# EAGLE board sensor_board_repair (EAGLE 9.0.0)
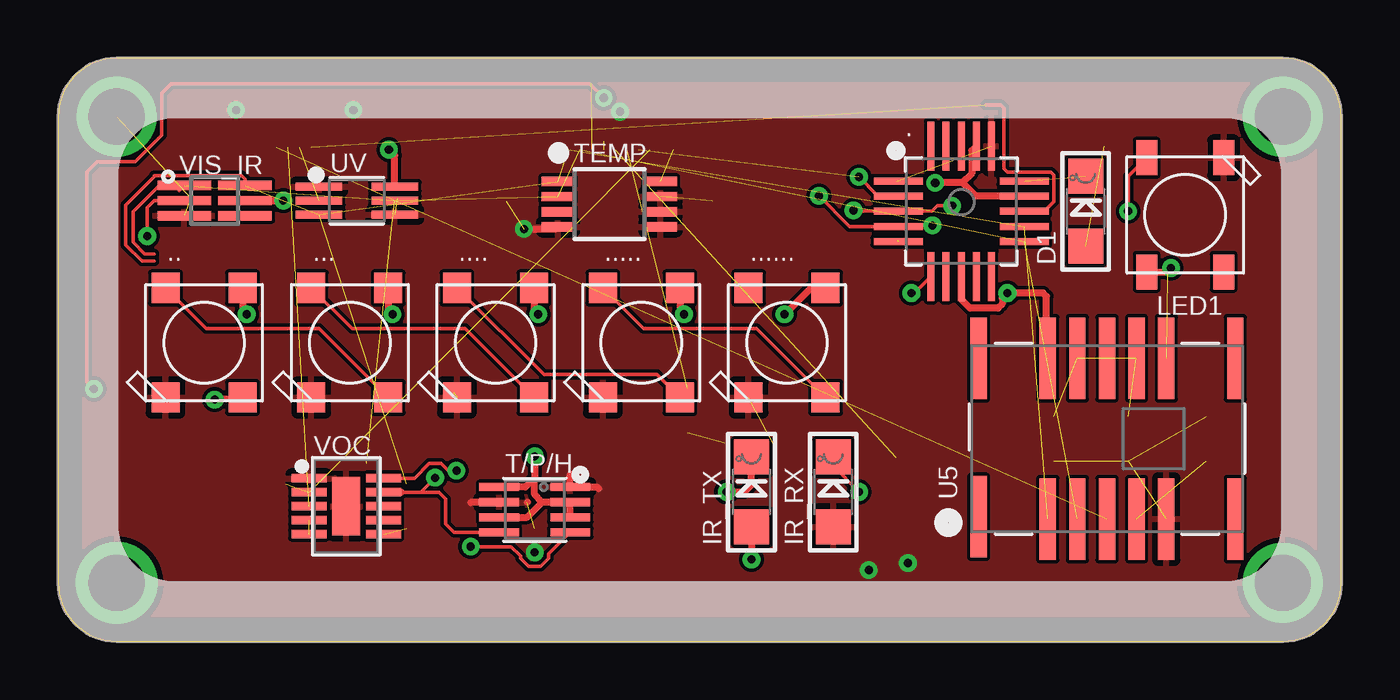
[diagram p0: board, top side]
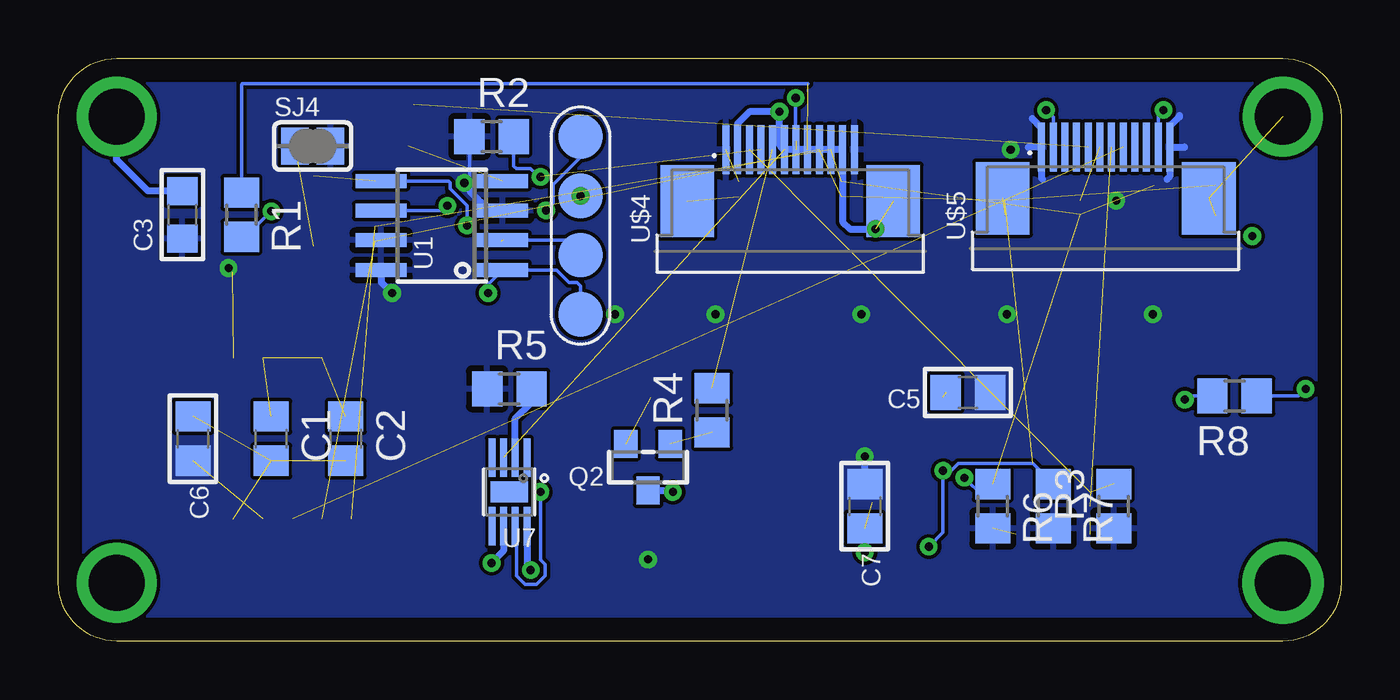
[diagram p1: board, bottom side, seen from below]

Size 55 x 25 mm. Coordinates in mm from the lower left corner, seen from the top.
Copper layers (1*16): Top 0.035mm / dielectric 1.5mm / Bottom 0.035mm
Design rules "default *": minimum track width 12mil, minimum drill 0.35mm, track to track 6mil, track to pad 6mil, pad to pad 6mil, via to via 6mil, smd to smd 6mil, copper to edge 40mil, drill to drill 6mil, minimum pad ring 10mil, minimum via ring 8mil, stop-mask expansion 4mil, vias tented up to drill 0mil, thermal gap 10mil

## Footprints (pad centres in the part's own frame; a part is rotated, then mirrored left to right if it is on the bottom)
MICROBUILDER_AS726X_LGA20_EXTENDED = smd 2.1 x 0.3: 1 -2.7,1.3; 2 -2.7,0.65; 3 -2.7,0; 4 -2.7,-0.65; 5 -2.7,-1.3; 11 2.7,-1.3; 12 2.7,-0.65; 13 2.7,0; 14 2.7,0.65; 15 2.7,1.3 | smd 0.3 x 2.1: 6 -1.3,-2.8; 7 -0.65,-2.8; 8 0,-2.8; 9 0.65,-2.8; 10 1.3,-2.8; 16 1.3,2.8; 17 0.65,2.8; 18 0,2.8; 19 -0.65,2.8; 20 -1.3,2.8
WS2812B-NARROW = smd 1.3 x 1.2: 1-VDD 2.35,-1.65; 2-DOUT 2.35,1.65; 3-GND -2.35,1.65; 4-DIN -2.35,-1.65
C0805 = smd 1.3 x 1.5: 1 -0.95,0; 2 0.95,0
MICROBUILDER__0805 = smd 1.2 x 1.3: 1 -1.016,0; 2 1.016,0
MICROBUILDER_0805_NOTHERMALS = smd 1.3 x 1.5: 1 -0.95,0; 2 0.95,0
MICROBUILDER_CHIPLED_1206 = smd 1.5 x 1.5: A 0,-1.496; C 0,1.496
1X4_POGO = smd 1.905 x 1.905: 1 -3.81,0; 2 -1.27,0; 3 1.27,0; 4 3.81,0
CHIPLED_1206 = smd 1.5 x 1.5: A 0,-1.496; C 0,1.496
WS2812B = smd 1.5 x 0.9: 1-VDD 2.45,-1.65; 2-DOUT 2.45,1.65; 3-GND -2.45,1.65; 4-DIN -2.45,-1.65
SOT23-WIDE = smd 1 x 1.2: 1 -0.95,-1; 2 0.95,-1; 3 0,1
R0805 = smd 1.3 x 1.5: 1 -0.95,0; 2 0.95,0
SOLDERJUMPER_CLOSEDWIRE = smd 1.168 x 1.6: 1 -0.762,0; 2 0.762,0 | smd 0.635 x 0.203: WIRE 0,0
MICROBUILDER_BME280-EXTENDED = smd 1.7 x 0.35: 1 1.525,0.975; 2 1.525,0.325; 3 1.525,-0.325; 4 1.525,-0.975; 5 -1.525,-0.975; 6 -1.525,-0.325; 7 -1.525,0.325; 8 -1.525,0.975
MICROBUILDER_MSOP8_0.65MM = smd 0.4 x 1.4: 1 -0.975,-2.2; 2 -0.325,-2.2; 3 0.325,-2.2; 4 0.975,-2.2; 5 0.975,2.2; 6 0.325,2.2; 7 -0.325,2.2; 8 -0.975,2.2
MICROBUILDER_09_NOV_2015_SOIC8_150MIL = smd 0.6 x 2.2: 1 -1.905,-2.6; 2 -0.635,-2.6; 3 0.635,-2.6; 4 1.905,-2.6; 5 1.905,2.6; 6 0.635,2.6; 7 -0.635,2.6; 8 -1.905,2.6
MICROBUILDER_AMG8833_EXTENDED = smd 0.7 x 3.5: 1 -5.5,-3.35; 2 -2.54,-3.45; 3 -1.27,-3.45; 4 0,-3.45; 5 1.27,-3.45; 6 2.54,-3.45; 7 5.5,-3.45; 8 5.5,3.45; 9 2.54,3.45; 10 1.27,3.45; 11 0,3.45; 12 -1.27,3.45; 13 -2.54,3.45; 14 -5.5,3.45
VSOP383_EXTENDED = smd 0.3 x 1.65: 1 -0.75,-1.475; 2 -0.25,-1.475; 3 0.25,-1.475; 4 0.75,-1.475; 5 0.75,1.475; 6 0.25,1.475; 7 -0.25,1.475; 8 -0.75,1.475 | smd 1.6 x 0.9: THERMAL 0,0
TRICO04C_SEN_BRD = drill 2.4 pad 3.5: P$1 2.5,2.5 | drill 2.4: P$2 52.5,2.5; P$3 52.5,22.5; P$4 2.5,22.5
FPC_TE_1-1734839-2_EXTENDED = smd 0.3 x 2.1: 1 -2.75,0.5; 2 -2.25,0.5; 3 -1.75,0.5; 4 -1.25,0.5; 5 -0.75,0.5; 6 -0.25,0.5; 7 0.25,0.5; 8 0.75,0.5; 9 1.25,0.5; 10 1.75,0.5; 11 2.25,0.5; 12 2.75,0.5 | smd 2.3 x 3.1: SH1 -4.42,-1.7; SH2 4.42,-1.7
MICROBUILDER_VEML6070_EXTENDED = smd 2 x 0.35: 1 -1.625,0.6; 2 -1.625,0; 3 -1.625,-0.6; 4 1.625,-0.6; 5 1.625,0; 6 1.625,0.6
MICROBUILDER_DFN6_TAOS_EXTENDED = smd 2.3 x 0.4: 1 -1.3,0.65; 2 -1.3,0; 3 -1.3,-0.65; 4 1.3,-0.65; 5 1.3,0; 6 1.3,0.65
MICROBUILDER_CCS811-EXTENDED = smd 1.5 x 0.35: 1 -1.6,1.2; 2 -1.6,0.6; 3 -1.6,0; 4 -1.6,-0.6; 5 -1.6,-1.2; 6 1.6,-1.2; 7 1.6,-0.6; 8 1.6,0; 9 1.6,0.6; 10 1.6,1.2 | smd 1.2 x 2.5: THERMAL 0,0

## Placement (x,y rotation side)
.  [MICROBUILDER_AS726X_LGA20_EXTENDED]  38.71,18.44 0 top
..  WS2812B_5050N  [WS2812B-NARROW]  6.25,12.8 90 top
...  WS2812B_5050N  [WS2812B-NARROW]  12.5,12.8 90 top
....  WS2812B_5050N  [WS2812B-NARROW]  18.75,12.8 90 top
.....  WS2812B_5050N  [WS2812B-NARROW]  24.99,12.8 90 top
......  WS2812B_5050N  [WS2812B-NARROW]  31.24,12.8 90 top
C1  2.2  [C0805]  45.87,8.69 270 bottom
C2  1uf  [C0805]  42.67,8.69 270 bottom
C3  over 15 uf  [MICROBUILDER__0805]  49.68,18.29 90 bottom
C5  [MICROBUILDER_0805_NOTHERMALS]  16,10.67 180 bottom
C6  [MICROBUILDER_0805_NOTHERMALS]  49.23,8.69 270 bottom
C7  [MICROBUILDER_0805_NOTHERMALS]  20.42,5.79 270 bottom
D1  [MICROBUILDER_CHIPLED_1206]  44.04,18.44 0 top
HEDR1  1X4  [1X4_POGO]  32.61,17.83 90 bottom
IR_RX  PIN IR  [CHIPLED_1206]  33.22,6.4 0 top
IR_TX  IR TX  [CHIPLED_1206]  29.72,6.4 0 top
LED1  LED-NEO-WS2812B5050  [WS2812B]  48.31,18.29 270 top
Q2  [SOT23-WIDE]  29.72,7.47 180 bottom
R1  300 ohm  [R0805]  47.15,18.29 270 bottom
R2  10k  [R0805]  36.42,21.64 0 bottom
R3  10k  [R0805]  9.75,5.79 90 bottom
R4  100  [R0805]  26.97,9.91 90 bottom
R5  100  [R0805]  35.66,10.82 0 bottom
R6  10k  [R0805]  14.94,5.79 270 bottom
R7  10k  [R0805]  12.34,5.79 270 bottom
R8  300 ohm  [R0805]  4.57,10.52 180 bottom
SJ4  [SOLDERJUMPER_CLOSEDWIRE]  44.09,21.23 0 bottom
T/P/H  [MICROBUILDER_BME280-EXTENDED]  20.42,5.64 0 top
TEMP  SEN-TEMP-PERCISE-I2C-MCP9808-E/MS  [MICROBUILDER_MSOP8_0.65MM]  23.62,18.75 270 top
U1  [MICROBUILDER_09_NOV_2015_SOIC8_150MIL]  38.56,17.83 90 bottom
U5  [MICROBUILDER_AMG8833_EXTENDED]  44.96,8.69 0 top
U7  [VSOP383_EXTENDED]  35.66,6.4 180 bottom
U$1  SEN_BRD_TRICO04C  [TRICO04C_SEN_BRD]  0,0 0 top
U$4  HEDR-SEN-I2CSLAVE_EXTEN  [FPC_TE_1-1734839-2_EXTENDED]  23.62,20.57 0 bottom
U$5  HEDR-SEN-INTSLAVE_EXTEN  [FPC_TE_1-1734839-2_EXTENDED]  10.1,20.7 0 bottom
UV  [MICROBUILDER_VEML6070_EXTENDED]  12.8,18.9 0 top
VIS_IR  [MICROBUILDER_DFN6_TAOS_EXTENDED]  6.71,18.9 0 top
VOC  [MICROBUILDER_CCS811-EXTENDED]  12.34,5.79 0 top

## Library data of the parts
. C3 D1 HEDR1 Q2 SJ4 T/P/H U1 U5 U7 UV VIS_IR VOC = 0TG-Lib v01.1
.. ... .... ..... ...... = 00adafruit
C1 C2 LED1 = 0TG-Lib v01.0
C5-C7 TEMP = 0TG-Lib v01.2
IR_RX IR_TX = microbuilder
R1-R8 = 0TG-Lib v01.1; SPICEPREFIX: R
U$1 U$4 U$5 = 0Trico04_lib

## Nets
3V3: ..8 ..14 ..17 ...1-VDD ....1-VDD .....1-VDD ......1-VDD .......1-VDD C3.1 C5.1 C6.2 C7.1 IR_TX.A LED1.1-VDD R2.1 R3.1 R5.1 R6.2 R7.2 SJ4.2 T/P/H.2 T/P/H.3 T/P/H.6 T/P/H.8 TEMP.8 U1.3 U1.7 U1.8 U5.5 U5.9 U5.13 U$4.1 U$4.12 U$5.1 U$5.12 UV.6 VIS_IR.5 VOC.6
AMGCAPAV: C1.1 C2.1 U5.10 U5.12
AS7262_LED_GND: ..15 D1.C
CS: U$5.3
CSS_WAKE: VOC.7
FLASH_CS: ..6 HEDR1.1 U1.1
FLASH_MISO: ..5 HEDR1.2 U1.2
FLASH_MOSI: ..4 HEDR1.3 U1.5
FLASH_SCK: ..3 HEDR1.4 U1.6
GND: ..16 ...3-GND ....3-GND .....3-GND ......3-GND .......3-GND C1.2 C2.2 C3.2 C5.2 C6.1 C7.2 IR_RX.A LED1.3-GND Q2.2 T/P/H.1 T/P/H.7 TEMP.4 TEMP.5 TEMP.6 TEMP.7 U1.4 U5.6 U7.6 U7.8 U$1.P$1 U$1.P$2 U$1.P$3 U$1.P$4 U$4.2 U$4.11 U$4.SH1 U$4.SH2 U$5.2 U$5.11 U$5.SH1 U$5.SH2 UV.1 UV.4 VIS_IR.3 VOC.1 VOC.THERMAL
INT_AMG: U5.4 U$5.8
INT_AS7262: ..13 U$5.5
INT_CCS: U$5.7 VOC.3
INT_MCP: TEMP.3
INT_TSL: VIS_IR.2
INT_VEML: U$5.6 UV.2
IR_ANALOGIN: IR_RX.C U7.7
MISO: U$5.4
MOSI: U$5.10
N$1: VOC.4 VOC.5
N$2: D1.A SJ4.1
N$3: R5.2 U7.2
N$4: Q2.1 R4.1
N$5: ....2-DOUT .....4-DIN
N$6: ...4-DIN R8.2
N$7: ...2-DOUT ....4-DIN
N$8: ......2-DOUT .......4-DIN
N$11: .....2-DOUT ......4-DIN
N$13: LED1.4-DIN R1.2
N$21: IR_TX.C Q2.3
N$22: ..18
NEOPIX: R1.1 U$4.8
NEOPIX2: R8.1 U$4.7
REMOTEIN: U7.3 U$4.6
REMOTEOUT: R4.2 U$4.5
RESET_AS7262: ..2 R2.2 U$4.4
RESET_CCS: R3.2 U$4.3 VOC.2
SCK: U$5.9
SCL: ..11 R7.1 T/P/H.4 TEMP.2 U5.3 U$4.9 UV.5 VIS_IR.1 VOC.10
SDA: ..12 R6.1 T/P/H.5 TEMP.1 U5.2 U$4.10 UV.3 VIS_IR.6 VOC.9

## Tracks (layer width: path | path; a pad name or v marks a point on that pad's centre or on a via)
3V3  (via drill 0.35)  (4 unrouted)
  Top 0.305: ..17 39.16,21.05 39.16,20.06 38.76,19.66 | 38.76,19.66 v37.59,19.66 | ...1-VDD 7.9,14.2 v8.08,14.02 | ....1-VDD 14.15,14.2 v14.33,14.02 | .....1-VDD 20.39,14.2 v20.57,14.02 | ......1-VDD 26.64,14.2 v26.82,14.02 | .......1-VDD 32.26,15.15 v31.13,14.02 | ..14 39.33,19.09 38.76,19.66 | ..8 38.71,14.66 39.08,14.29 40.29,14.29 40.46,14.46 40.46,14.71 v40.69,14.94 42.22,14.94 42.37,14.78 42.37,13.56 42.42,13.51 U5.13 | LED1.1-VDD 47.54,15.84 v47.7,16 | VIS_IR.5 v9.65,18.9 | UV.6 14.43,20.83 v14.17,21.08 | v20.42,7.92 20.42,7.01 | T/P/H.8 20.02,6.61 20.42,7.01 | 20.75,5.96 T/P/H.2 T/P/H.3 | 20.75,5.96 20.42,6.29 20.42,7.01 | T/P/H.6 20.1,5.31 20.75,5.96 | IR_TX.A v29.72,3.5
  Bottom 0.152: R2.1 37.37,19.88 v37.59,19.66
  Bottom 0.305: v37.59,19.66 37.36,19.43 37.36,19.31 36.52,18.47 U1.3 | U$5.12 6.72,21.2 6.71,21.18 | U$5.12 7.35,19.93 7.47,19.81 | 6.94,22.55 6.94,22.5 7.35,22.09 U$5.12 | U$5.1 12.85,19.86 12.8,19.81 | U$5.1 13.4,21.2 13.41,21.18 | U$5.1 12.85,22.01 13.25,22.41 | U1.8 41.16,15.4 v40.69,14.94 | C7.1 v20.42,7.92
  pour Bottom: -1.68,26.97 57,26.97 57,-1.22 -1.68,-1.22
AMGCAPAV  (3 unrouted)
AS7262_LED_GND  (1 unrouted)
FLASH_CS  (via drill 0.35)
  Top 0.152: ..6 36.7,14.94 v36.58,14.94
  Bottom 0.152: HEDR1.1 32.61,15.23 32.77,15.38 33.1,15.38 33.65,15.93 U1.1 36.58,15.31 v36.58,14.94
FLASH_MISO  (1 unrouted)
  Bottom 0.152: HEDR1.2 33.25,17.2 U1.2
FLASH_MOSI  (via drill 0.35)
  Top 0.152: HEDR1.3 33.92,17.79 ..4 36.05,17.83 v37.47,17.83
  Bottom 0.152: U1.5 38.27,19.74 38.2,19.66 38.2,19.41 37.47,18.68 v37.47,17.83
  other vias: 32.61,19.1
FLASH_SCK  (via drill 0.35)
  Top 0.152: v34.09,18.48 34.13,18.44 ..3 37.46,18.44 37.69,18.68 v38.32,18.68
  Bottom 0.152: v34.09,18.48 33.8,18.78 33.8,19.59 32.61,20.77 HEDR1.4 | U1.6 38.53,18.47 v38.32,18.68
GND  (via drill 0.35)  (12 unrouted)
  Top 0.305: v19.96,17.68 21.33,17.68 TEMP.4 | T/P/H.7 17.7,5.96 17.68,5.94 | 20.1,5.96 | 21.95,7.16 T/P/H.1 23.1,6.61 23.16,6.55
  Bottom 0.152: U$5.11 7.85,22.55 v7.62,22.78 | U$5.2 12.35,22.48 v12.65,22.78
  Bottom 0.305: U$4.2 25.87,22.2 25.37,22.71 v24.08,22.71 24.08,21.38 arc-90 23.77,21.07 U$4.11 21.37,17.98 21.07,17.68 v19.96,17.68 | C7.2 v20.42,3.81 | U7.8 34.91,3.21 v34.75,3.05 | U7.6 35.91,3.87 v36.42,3.35 | C3.2 51.16,19.3 52.5,20.65 U$1.P$3
  pour Top: -0.46,25.76 55.93,25.76 55.93,-0.61 -0.46,-0.61
INT_AMG  (1 unrouted)
INT_AS7262  (1 unrouted)
  Top 0.152: ..13 42.37,18.44 42.37,18.52 42.69,18.85 42.69,19.98 42.55,20.12 40.69,20.12 40.54,20.27 40.54,22.86 40.39,23.01 39.78,23.01
INT_CCS  (1 unrouted)
INT_TSL  (via drill 0.35)
  Top 0.152: VIS_IR.2 4.12,18.9 3.81,18.59 v3.81,17.37
INT_VEML  (1 unrouted)
IR_ANALOGIN  (via drill 0.35)
  Top 0.152: v34.33,6.4 33.22,7.51 IR_RX.C
  Bottom 0.152: U7.7 35.35,4.87 35.35,2.8 35,2.44 34.5,2.44 34.14,2.8 34.14,3.3 34.33,3.49 v34.33,6.4
N$1  (1 unrouted)
N$2  (1 unrouted)
N$3
  Bottom 0.305: U7.2 35.41,9.55 34.71,10.25 R5.2
N$4  (1 unrouted)
N$5
  Top 0.152: ....2-DOUT 12.59,13.41 17.44,13.41 .....4-DIN
N$6  (via drill 0.35)
  Top 0.152: ...4-DIN 6.79,10.45 v6.71,10.36
  Bottom 0.152: v6.71,10.36 6.55,10.52 R8.2
N$7
  Top 0.152: ...2-DOUT 6.34,13.41 11.19,13.41 ....4-DIN
N$8
  Top 0.152: ......2-DOUT 25.08,13.41 29.93,13.41 .......4-DIN
N$11
  Top 0.152: .....2-DOUT 20.82,11.43 25.66,11.43 ......4-DIN
N$13  (via drill 0.35)
  Top 0.152: LED1.4-DIN 45.87,19.94 v45.87,18.44
  Bottom 0.152: v45.87,18.44 46.96,17.34 R1.2
N$21  (via drill 0.35)
  Top 0.305: v28.65,6.4 29.41,6.4 29.72,6.71 IR_TX.C
  Bottom 0.305: Q2.3 28.72,6.47 v28.65,6.4
NEOPIX  (1 unrouted)
  Bottom 0.152: R1.1 47.15,23.87 47.11,23.91 22.86,23.91
NEOPIX2  (via drill 0.35)  (1 unrouted)
  Top 0.152: v1.52,10.82 1.22,11.12 1.22,20.12 1.68,20.57 1.69,20.57 1.7,20.56 3.3,20.56 4.44,21.7 4.44,23.49 4.86,23.91 4.88,23.91 22.78,23.91 v23.39,23.3
  Bottom 0.152: R8.1 1.83,10.52 v1.52,10.82 | v23.39,23.3 23.39,21.47 23.37,21.45
REMOTEIN  (1 unrouted)
REMOTEOUT  (1 unrouted)
RESET_AS7262  (via drill 0.35)  (1 unrouted)
  Top 0.152: v34.33,19.92 34.73,19.51 34.73,19.5 35.14,19.09 ..2
  Bottom 0.152: v34.33,19.92 34.41,19.92 34.76,20.26 35.36,20.26 35.47,20.38 R2.2
RESET_CCS  (2 unrouted)
SCL  (via drill 0.35)  (6 unrouted)
  Top 0.152: 5.18,19.33 VIS_IR.1 4.33,19.55 3.2,18.42 3.2,17.38 3.2,17.37 3.2,17.12 3.71,16.61 4.12,16.61 | VOC.10 15.28,6.99 15.9,7.62 16.41,7.62 16.71,7.32 v17.07,7.32 | T/P/H.4 21.03,3.75 21.03,3.56 20.67,3.2 20.17,3.2 19.82,3.56 19.82,3.65 19.41,4.06 v17.68,4.06
  Bottom 0.152: R7.1 13.22,7.62 16.4,7.62 16.71,7.32 v17.07,7.32 17.07,4.67 v17.68,4.06
SDA  (via drill 0.35)  (6 unrouted)
  Top 0.152: VIS_IR.6 8.01,19.81 7.85,19.96 6.78,19.96 6.78,19.98 4.12,19.98 4.12,19.93 2.9,18.71 2.9,17 3.59,16.31 4.12,16.31 | T/P/H.5 16.98,4.66 16.61,5.03 16.61,6.1 16.32,6.39 VOC.9 15.54,6.39 v16.15,7.01
  Top 0.305: VOC.9 14.7,6.39
  Bottom 0.152: v16.15,7.01 15.39,6.25 15.24,6.25 15.24,6.44 R6.1